# Altium PCB Sensor10.PcbDoc
Units mil, origin at the board's own origin, x right, y up, seen from the top; angles counter-clockwise.
Board outline 325 x 240 mil, 2 copper layers (Top Layer, Bottom Layer), stack 17.8 mil thick; 3 components, 4 nets, 23 pads, 0 vias.
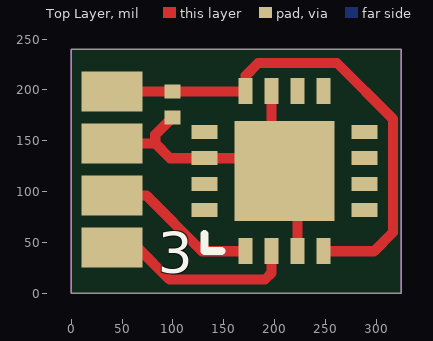
[diagram p0: Top Layer view]
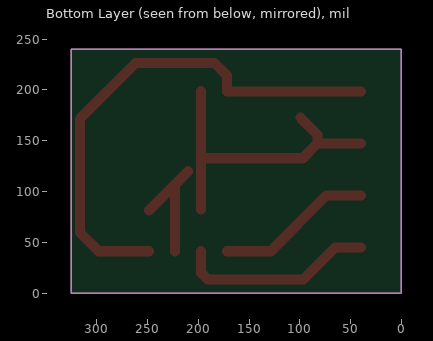
[diagram p1: Bottom Layer view, seen from below]

## Layer stack, top to bottom
Top Solder: solder mask 0.4, Solder Resist, Dk 3.5
Top Layer: signal copper 1.4
Dielectric1: dielectric 15, FR-4, Dk 4.8
Bottom Layer: signal copper 1.4
Bottom Solder: solder mask 0.4, Solder Resist, Dk 3.5

## Board outline
0,0 325,0 325,240 0,240

## Design rules (kind name [scope] priority, off if disabled: settings)
Clearance [All] p1: gap=10 ignorepadtopadclearanceinfootprint=FALSE except(0: Arc-Hole Track-Hole SMDPad-Hole THPad-Hole Via-Hole Fill-Hole Poly-Hole Region-Hole Text-Hole)
PolygonConnect [All] p1: connectstyle=Relief reliefconductorwidth=10 reliefentries=4 polygonreliefangle="90 Angle" airgapwidth=10
RoutingVias [All] p1: holewidth=28 width=50 viastyle="Through Hole" minholewidth=28 minwidth=50 maxholewidth=28 maxwidth=50
SilkToSolderMaskClearance SilkscreenOverComponentPads [IsPad] p1: minsilkscreentomaskgap=10 clearancetoexposedcopper=TRUE
SolderMaskExpansion [All] p1: expansion=4 istentingtop=FALSE
Width [All] p1: maxlimit=10 minlimit=10 preferedwidth=10
29 further rules are at their usual default settings.

## Components (designator, comment, footprint, x,y, rotation, side; value= is the part's Value field where it differs from the comment)
C1 "100nF CON0603" CAPC0603X06N 5,32 r270 top
J1 "SENSORCONECTOR" ConectorSMD1,3mm 40,45 r0 top
U1 "AD7422" ADT7422 210,120 r90 top

## Footprints (in the part's own frame and the unit in brackets; to place one, negate y for a bottom-side part, rotate by r counter-clockwise, add the part's x,y. Pads: shape width x height; smd on the part's side, far side on the other; paste and mask are expansions set on the pad)
ADT7422 [mm] "QFN, 16-Leads, Body 3,9x3,9mm (max), Pitch 0,65mm, IPC Medium Density"
  rect 0.65x0.35 smd: 1(-2,0.975) 2(-2,0.325) 3(-2,-0.325) 4(-2,-0.975) 9(2,-0.975) 10(2,-0.325) 11(2,0.325) 12(2,0.975)
  rect 0.35x0.65 smd: 5(-0.975,-2) 6(-0.325,-2) 7(0.325,-2) 8(0.975,-2) 13(0.975,2) 14(0.325,2) 15(-0.325,2) 16(-0.975,2)
  rect 2.5x2.5 smd: 17(0,0)
  silkscreen extent -2,1.58 -1.58,2, body extent -1.95,-1.95 1.95,1.95, height 0.8
CAPC0603X06N [mm] "Chip Capacitor, 2-Leads, Body 0,6x0,3mm, IPC Medium Density"
  rect 0.35x0.4 smd: 1(-4.225,2.4) 2(-3.575,2.4)
  body extent -4.23,2.22 -3.58,2.57, height 0.6
ConectorSMD1,3mm [mm]
  rect 1.524x1 smd: 0(0,0) 1(0,1.3) 2(0,2.6) 3(0,3.9)

## Part data
C1: library part CON0603

## Nets (pads, with @x,y where several pads share a name; then routed paths per layer and width w, separated by ;. In a path a pad name is that pad's centre, name@x,y a point inside that pad or via, vN(x,y) a via of type N, cw(c..) or ccw(c..) an arc to the next point about the centre after c; other vN are vias at no path point)
GND: C1.2 J1.2 U1.3 U1.11 U1.14 U1.17 | length 432.4
  Top Layer w10: J1.2 82.64,147.36 ; C1.2 82.64,155.9 82.64,147.36 ; U1.17@197.2,82.16 U1.17@197.2,132.8 ; U1.11 U1.17@197.2,132.8 ; U1.17 U1.17@222.8,107.2 ; U1.3 U1.17@222.8,107.2 ; U1.17@248.39,81.61 U1.17@222.8,107.2 ; 82.64,147.36 97.2,132.8 U1.17@197.2,132.8
SCL: J1.1 U1.1 | length 154.4
  Top Layer w10: J1.1 73.82,96.18 128.74,41.26 U1.1
SDA: J1.0 U1.2 | length 194.2
  Top Layer w10: J1.0 65,45 96.54,13.46 190.67,13.46 197.2,20 U1.2
VCC: C1.1 J1.3 U1.4 U1.12 | length 507.5
  Top Layer w10: J1.3 171.42,198.54 U1.12 171.61,214.05 184.1,226.54 261.49,226.54 316.54,171.49 316.54,59.72 298.07,41.26 U1.4
pads on no net: U1.5 U1.6 U1.7 U1.8 U1.9 U1.10 U1.13 U1.15 U1.16

## Keep-outs
Keep-Out Layer:
  the board outline again, w0

## Silkscreen, mask and mechanical layers (free items; w line width, h text height)
Top Overlay:
  text "3" at 85,20 h40